# Altium PCB PCB2.PcbDoc
Units mil, origin at the board's own origin, x right, y up, seen from the top; angles counter-clockwise.
Board outline 1160 x 1040 mil, 2 copper layers (Top Layer, Bottom Layer); 4 components, 10 nets, 27 pads, 5 vias.
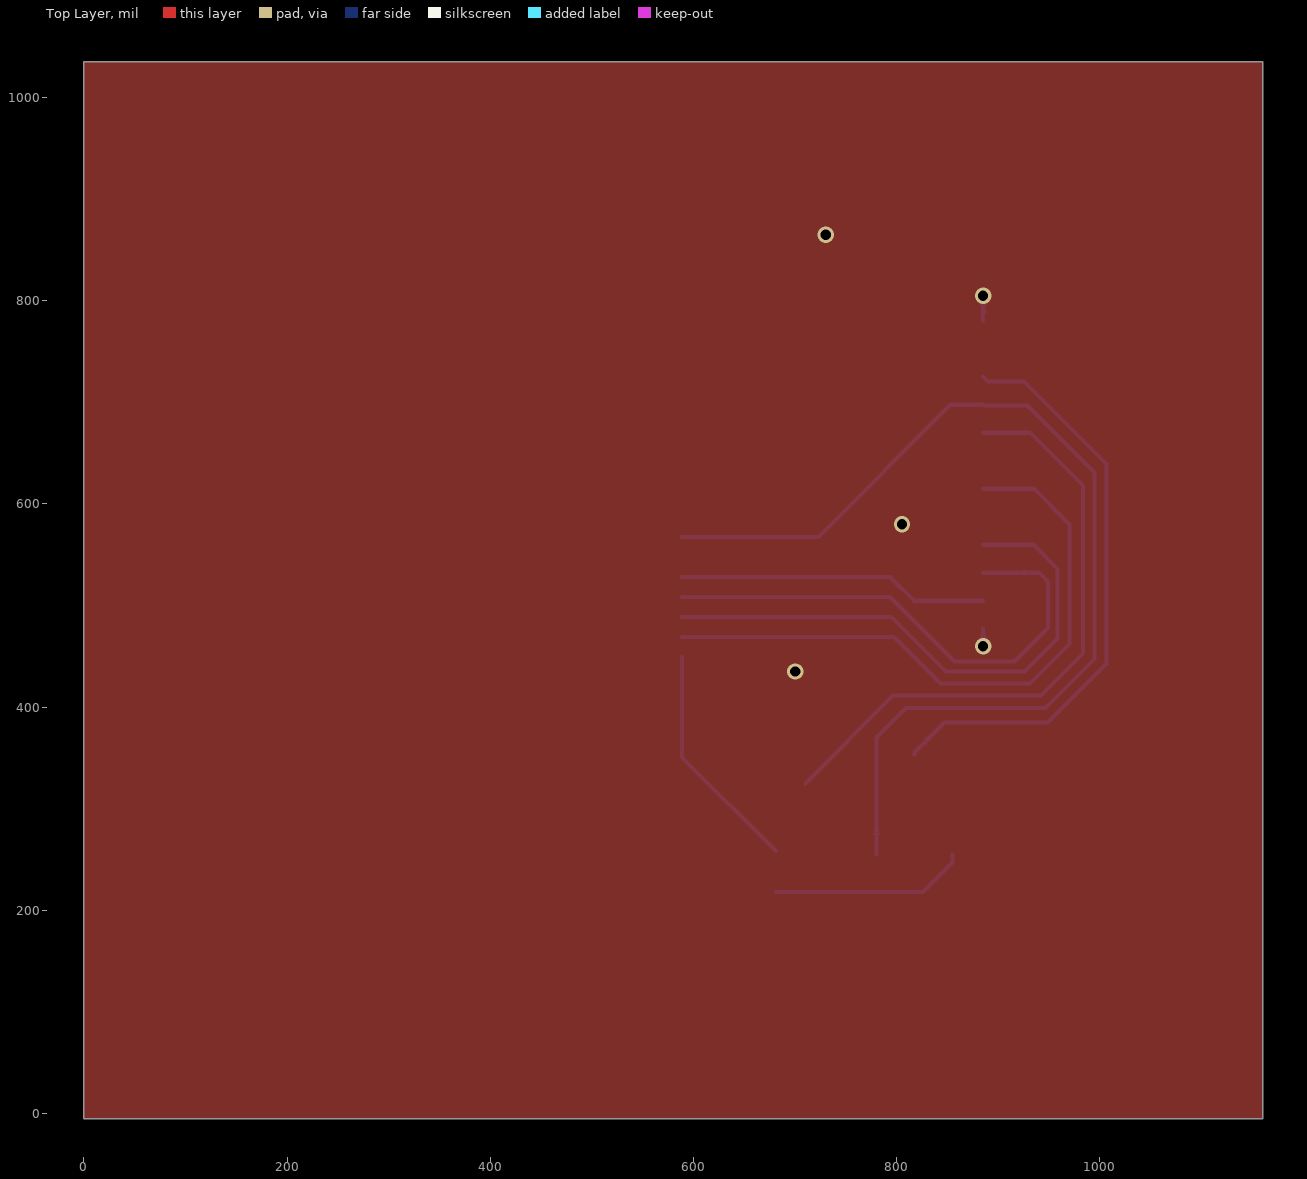
[diagram p0: Top Layer view]
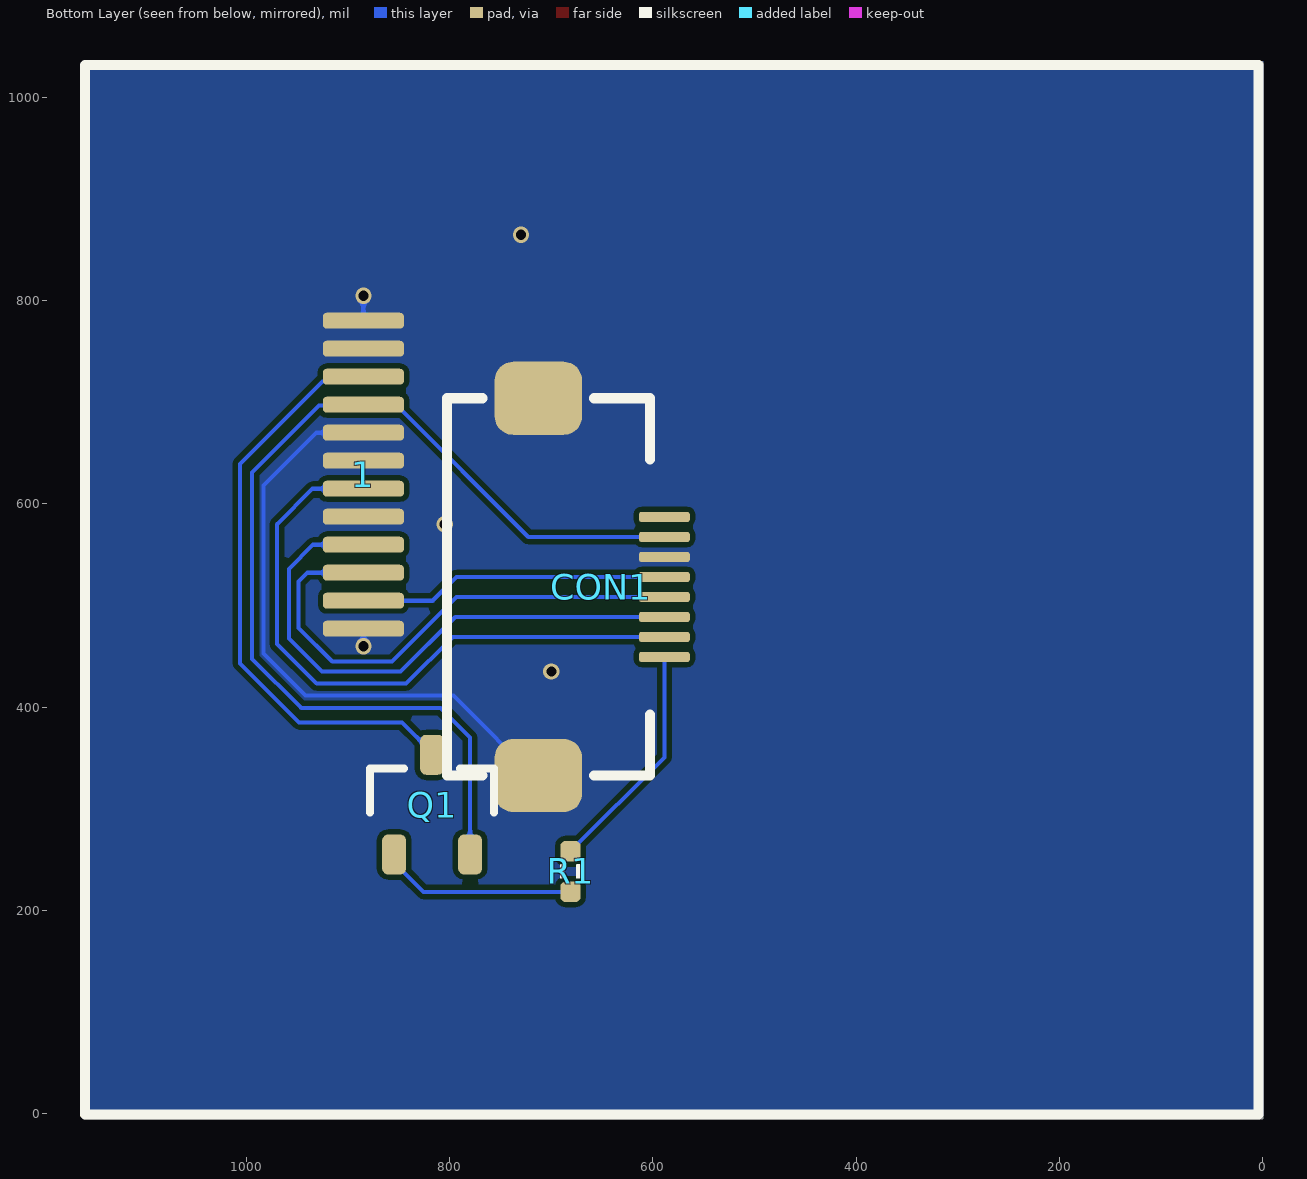
[diagram p1: Bottom Layer view, seen from below]
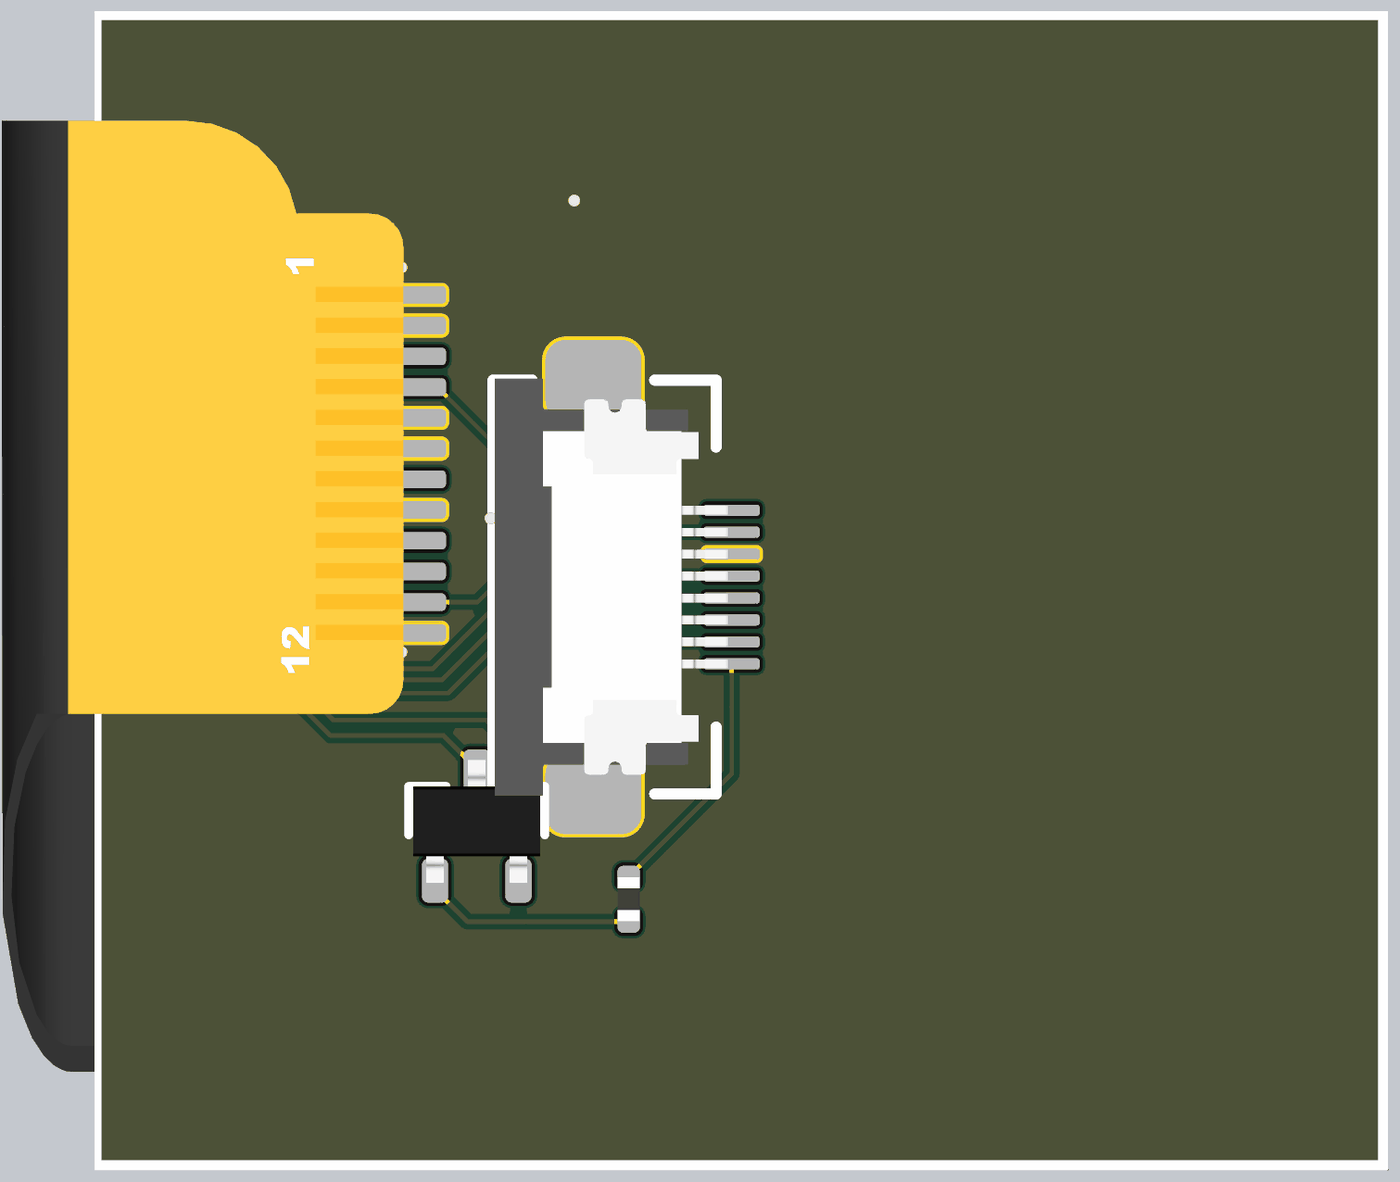
[diagram p2: 3D render of the assembled board from below, using the file's embedded part models]

## Layer stack, top to bottom
Top Solder: solder mask 0.4, Solder Resist, Dk 3.5
Top Layer: signal copper 1.4
Dielectric 1: dielectric 12.6, FR-4, Dk 4.8
Bottom Layer: signal copper 1.4
Bottom Solder: solder mask 0.4, Solder Resist, Dk 3.5

## Board outline
0,-5 1160,-5 1160,1035 0,1035

## Design rules (kind name [scope] priority, off if disabled: settings)
Clearance [All] p1: gap=5 ignorepadtopadclearanceinfootprint=FALSE
ComponentClearance [All] p1: gap=0 collisioncheckmode=3 verticalgap=0 showdistances=FALSE
DiffPairsRouting [All] p1: maxlimit=9 minlimit=9 mostfreqgap=9 toplayer_minwidth=4 toplayer_maxwidth=4 toplayer_prefwidth=4 bottomlayer_minwidth=4 bottomlayer_maxwidth=4 bottomlayer_prefwidth=4 maxuncoupledlength=500
FanoutControl Fanout_BGA [All] p1: bgadir=Out bgaviamode=Centered fanoutstyle=Auto fanoutdirection=Alternating viagrid=1 // Fanout_BGA (Default Rule)
HoleSize [All] p1: absolutevalues=TRUE maxlimit=10000 minlimit=8 maxpercent=80.000 minpercent=20.000
MinimumSolderMaskSliver [All] p1 off: minsoldermaskwidth=2
PlaneClearance [All] p1: clearance=8
PlaneConnect [All] p1: planeconnectstyle=Direct reliefexpansion=20 reliefentries=4 reliefconductorwidth=10 reliefairgap=10
PolygonConnect [All] p1: connectstyle=Direct reliefconductorwidth=10 reliefentries=4 polygonreliefangle="90 Angle" airgapwidth=10
RoutingVias [All] p1: holewidth=8 width=16 viastyle="Through Hole" minholewidth=6 minwidth=12 maxholewidth=28 maxwidth=50
SilkToSilkClearance [All] p1: silktosilkclearance=0
SilkToSolderMaskClearance [IsPad] p1: minsilkscreentomaskgap=0 clearancetoexposedcopper=TRUE
SolderMaskExpansion [All] p1: expansion=3 istentingtop=FALSE
Width [All] p1: maxlimit=10000 minlimit=4 preferedwidth=4
21 further rules are at their usual default settings.

## Components (designator, comment, footprint, x,y, rotation, side; value= is the part's Value field where it differs from the comment)
1 "LCD-240x240" LCD-240x240-NoHole 678,498.35 r90 top
CON1 "FFC_0.5_8" FFC_0.5_8 677.76,518.34 r270 bottom
Q1 "AO3415A" SOT23-3 817.4,304.06 r90 bottom
R1 "1K" RES_0402 681.15,238.26 r270 bottom value=22R

## Footprints (in the part's own frame and the unit in brackets; to place one, negate y for a bottom-side part, rotate by r counter-clockwise, add the part's x,y. Pads: shape width x height; smd on the part's side, far side on the other; paste and mask are expansions set on the pad)
FFC_0.5_8 [mil]
  rrect50% 72x86 smd: 0(-185.63,-35) 0(185.63,-35)
  rrect50% 10x50 smd: 1(-68.9,89) 2(-49.21,89) 3(-29.53,89) 4(-9.84,89) 5(9.84,89) 6(29.53,89) 7(49.21,89) 8(68.9,89)
  silkscreen extent -186,-125 186,75, body extent -187,-124 187,87, height 82
LCD-240x240-NoHole [mil]
  rrect50% 15.75x80 smd far side: 1(282,-207) 2(254.44,-207) 3(226.88,-207) 4(199.32,-207) 5(171.76,-207) 6(144.2,-207) 7(116.65,-207) 8(89.09,-207) 9(61.53,-207) 10(33.97,-207) 11(6.41,-207) 12(-21.15,-207)
  body extent -499,-565 534,673, height 20
RES_0402 [mil]
  rrect50% 20x20 smd: 1(-20,0) 2(20,0)
  silkscreen extent -7,-10 7,10, body extent -20,-10 20,10, height 14
SOT23-3 [mm] "SOT23, 3-Leads, Body 3.1x3.0mm (max), Pitch 0.95mm, IPC Medium Density"
  rrect50% 1x0.6 smd: 1(-1.246,0.95) 2(-1.246,-0.95) 3(1.246,0)
  silkscreen extent -0.2,-1.55 0.9,1.55, body extent -1.3,-1.45 1.5,1.45, height 1.2

## Part data
1: "显示屏"
CON1: "FFC", System=Connector
Q1: "MOSFET", LatestRevisionDate=17-Jul-2002, LatestRevisionNote="Re-released for DXP Platform.", PackageDescription="TO, Flat Index; 3 In-Line, Axial Leads; Body Dia. 4.6mm; Lead Dia. 0.5 mm (max)", PackageReference=E3, PackageVersion=1995/1996, Published=8-Jun-2000, Publisher="Altium Limited"
R1: library part 电阻-0402, "Resistor"

## Via types
v1: diameter 16, hole 10, Top Layer to Bottom Layer, tented both sides, 5 vias

## Nets (pads, with @x,y where several pads share a name; then routed paths per layer and width w, separated by ;. In a path a pad name is that pad's centre, name@x,y a point inside that pad or via, vN(x,y) a via of type N, cw(c..) or ccw(c..) an arc to the next point about the centre after c; other vN are vias at no path point)
BL: CON1.8 R1.1 | length 229.5
  Bottom Layer w4: CON1.8 588.76,350.64 R1.1
DC: 1.7 CON1.7 | length 633.6
  Bottom Layer w4: CON1.7 797.02,469.13 842.92,423.22 930.94,423.22 970,462.28 970,580 935,615 1.7
GND: 1.1 1.2 1.5 1.6 1.8 1.12 CON1.0 CON1.3 | length 653
  Bottom Layer w4: CON1.0@710,325 796.49,411.49 941.97,411.49 983.16,452.69 983.16,618.09 931.14,670.12 1.5 ; v1(885,460) 1.12 ; 1.1 v1(885,805)
  other v1: 700,435 805,580 730,865
LCD_BL: 1.3 Q1.3 | length 581
  Bottom Layer w4: Q1.3 817.4,355.38 847.13,385.1 948.44,385.1 1006.49,443.15 1006.49,639.44 925.37,720.56 889.68,720.56 1.3
LCD_MOSI: 1.10 CON1.5 | length 512.8
  Bottom Layer w4: CON1.5 793.19,508.5 856.69,445 915.65,445 948.68,478.03 948.68,523.64 940,532.32 1.10
NetQ1_1: Q1.1 R1.2 | length 193.5
  Bottom Layer w4: R1.2 825.94,218.26 854.8,247.13 Q1.1
RES: 1.11 CON1.4 | length 305.9
  Bottom Layer w4: CON1.4 793.31,528.18 816.73,504.76 1.11
SCK: 1.9 CON1.6 | length 557
  Bottom Layer w4: CON1.6 794.59,488.81 848.35,435.05 925.7,435.05 958.35,467.7 958.35,536.14 934.6,559.88 1.9
VDD33: 1.4 CON1.2 Q1.2 | length 1032.2
  Bottom Layer w4: CON1.2 722.75,567.55 852.87,697.68 1.4 ; Q1.2 780,370 809.11,399.11 946.16,399.11 994.54,447.49 994.54,631.13 928.66,697.01 1.4@885,697.01
VDD_5V: CON1.1

## Polygon pours and split planes (outlines as drawn)
no net on Bottom Layer "NONET_L02_P003" (solid, remove dead copper, pour order 3): 0,-5 1160,-5 1160,1035 0,1035
no net on Bottom Layer "NONET_L02_P002" (solid, remove dead copper, pour order 2): 0,-5 1160,-5 1160,1035 0,1035
no net on Bottom Layer "NONET_L02_P001" (solid, remove dead copper, pour order 1): 0,-5 1160,-5 1160,1035 0,1035
GND on Bottom Layer "GND_L02_P000" (solid, remove dead copper, pour order 0): 0,-5 1160,-5 1160,1035 0,1035
GND on Top Layer "GND_L01_P006" (solid, remove dead copper, pour order 6): 0,-5 1160,-5 1160,1035 0,1035

## Silkscreen, mask and mechanical layers (free items; w line width, h text height)
Mechanical 1:
  the board outline again, w10